# Altium PCB HOBO.PcbDoc
Units mil, origin at the board's own origin, x right, y up, seen from the top; angles counter-clockwise.
Board outline 1975 x 2065 mil, 2 copper layers (Top Layer, Bottom Layer); 17 components, 37 nets, 134 pads, 43 vias.
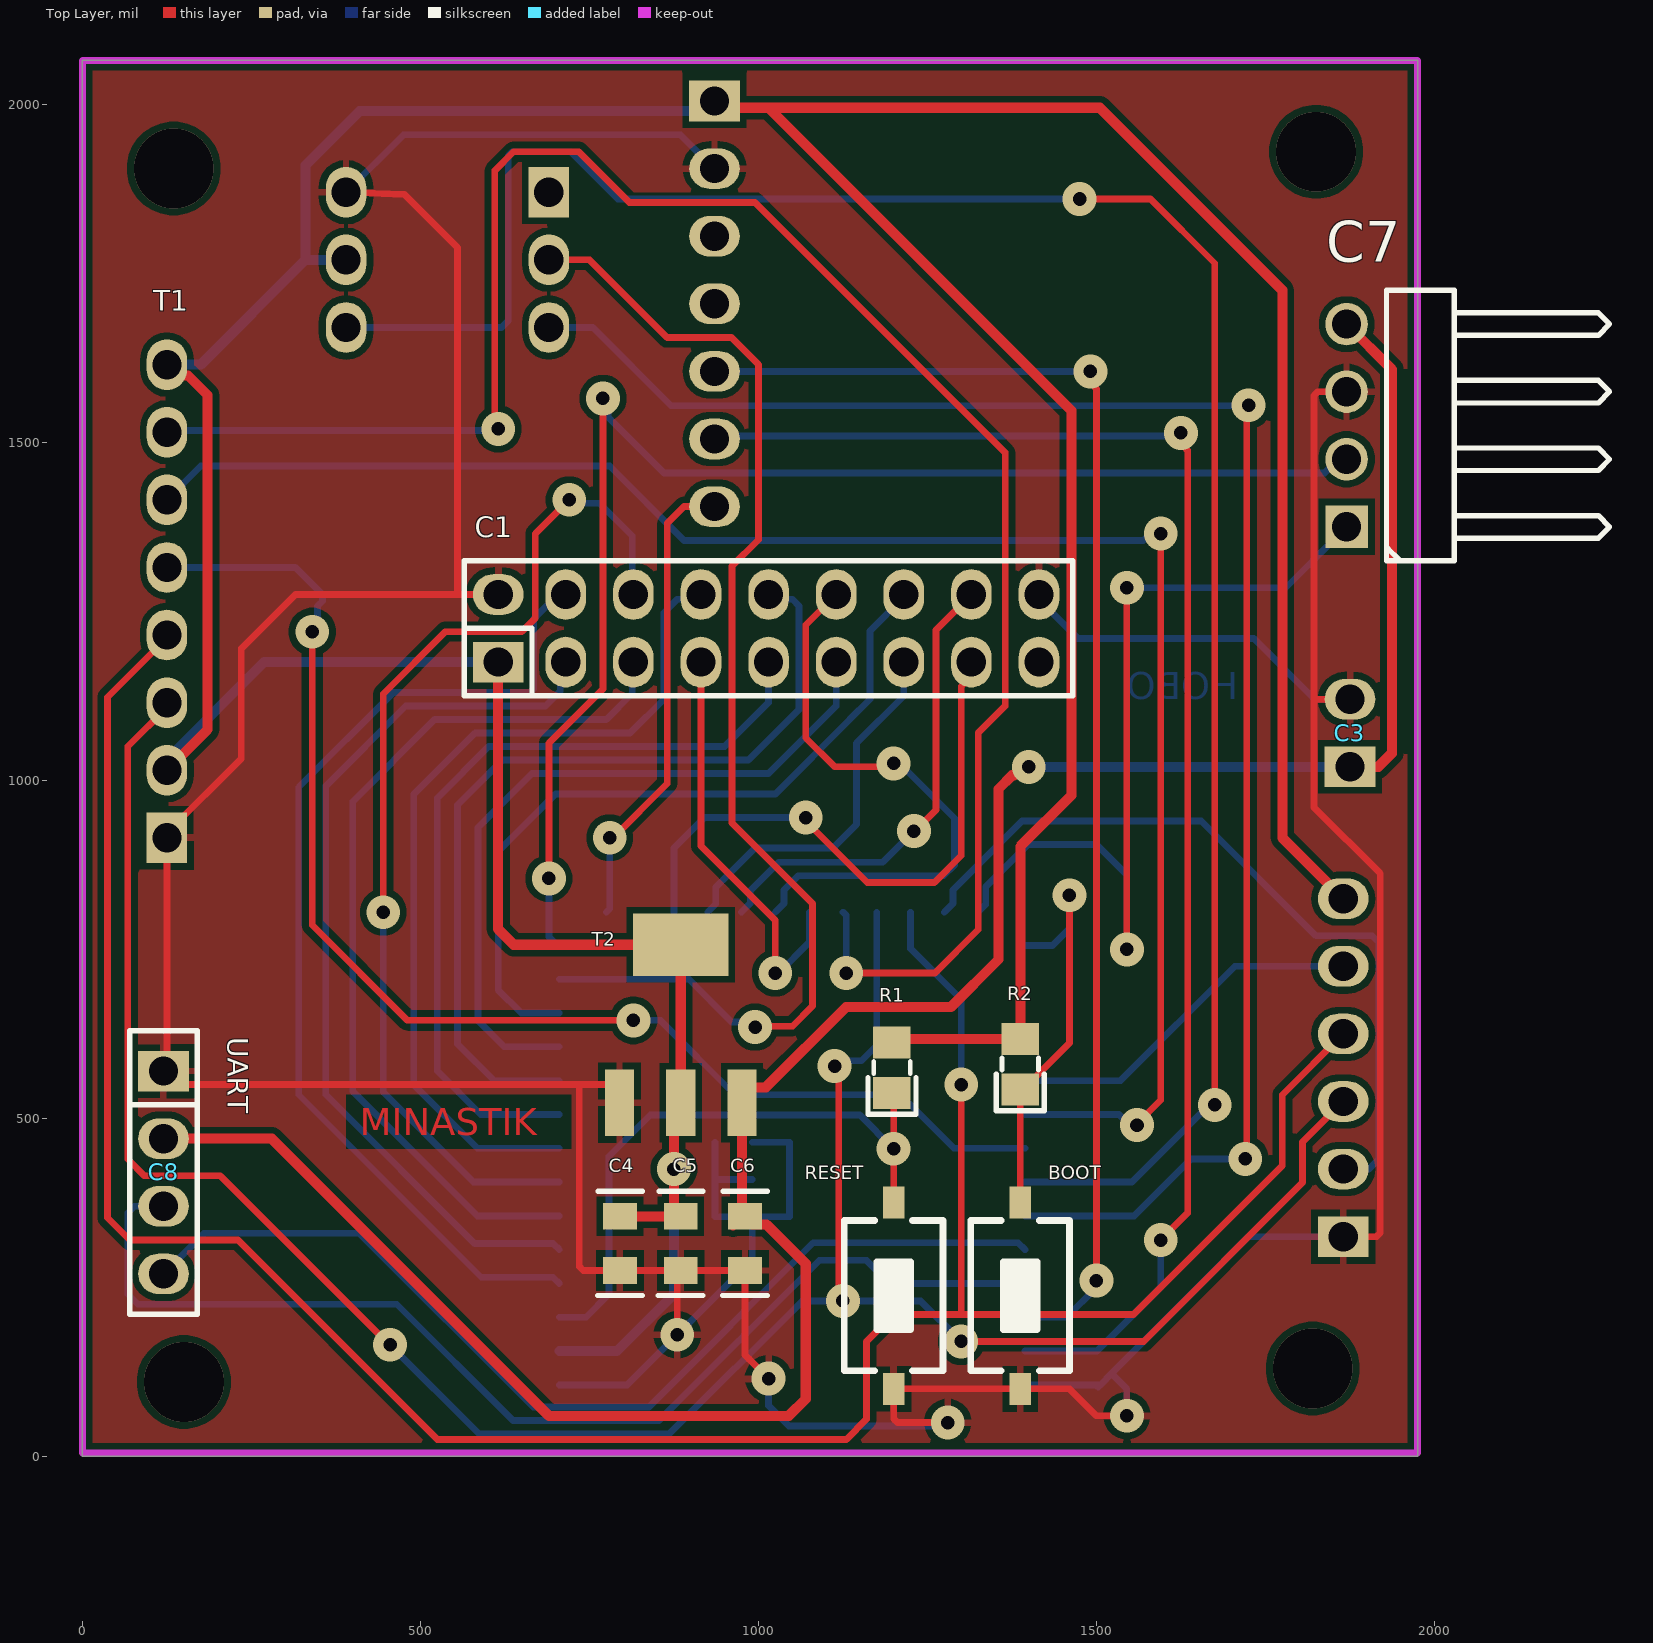
[diagram p0: Top Layer view]
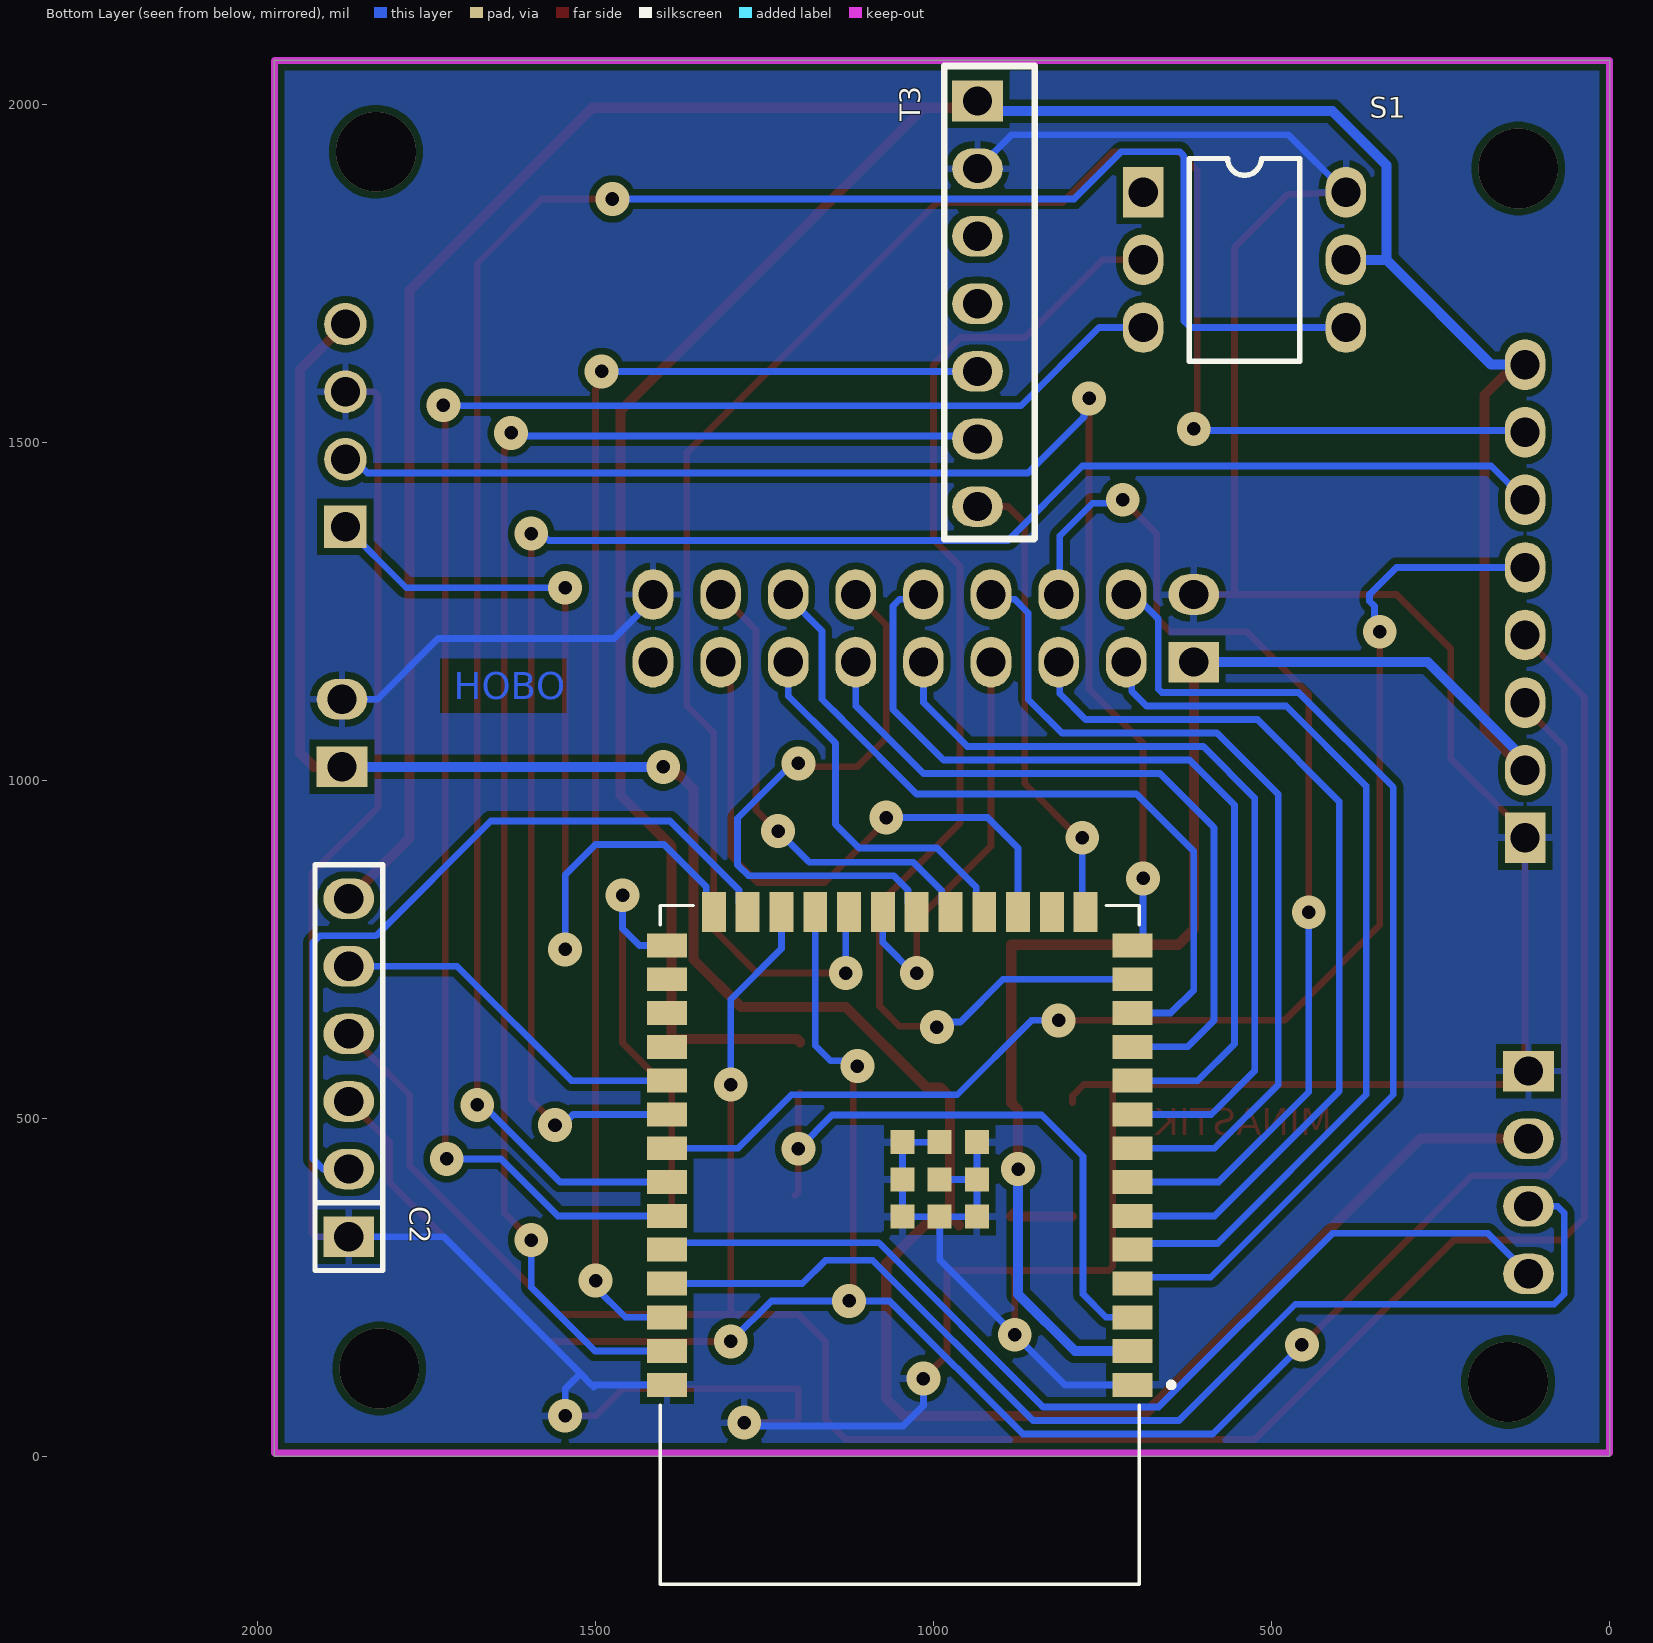
[diagram p1: Bottom Layer view, seen from below]
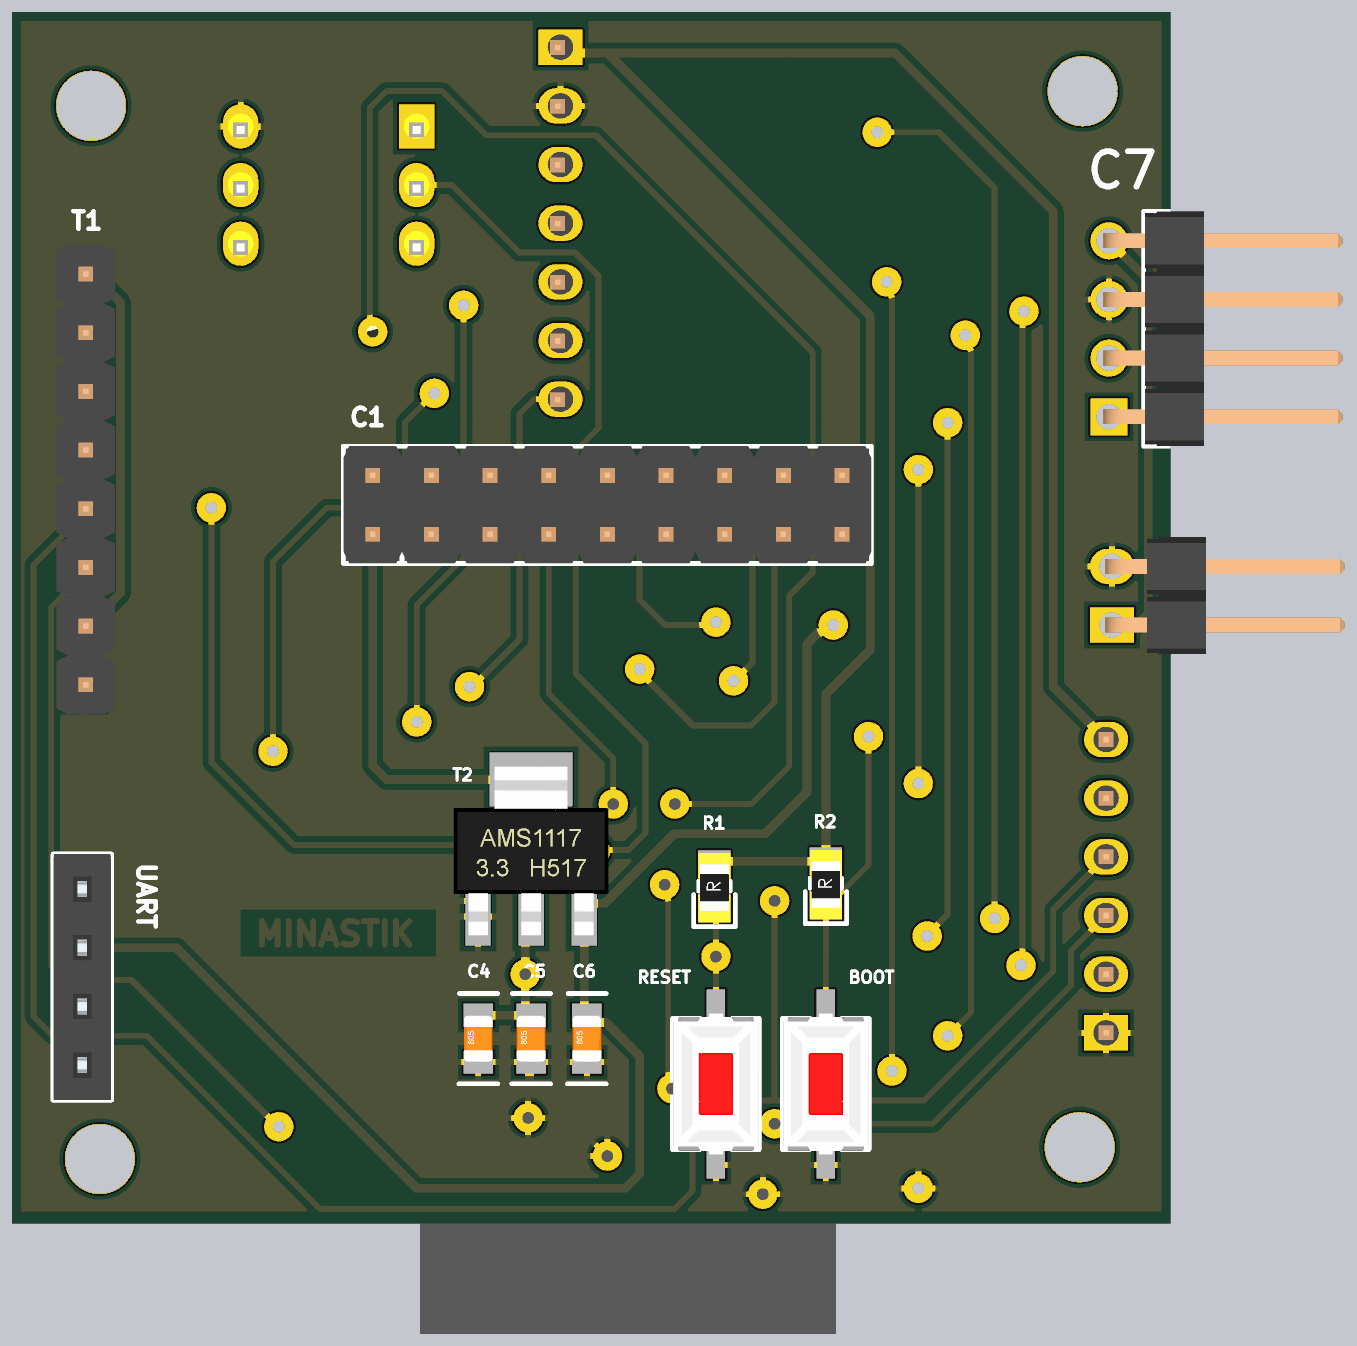
[diagram p2: 3D render of the assembled board from above, using the file's embedded part models]
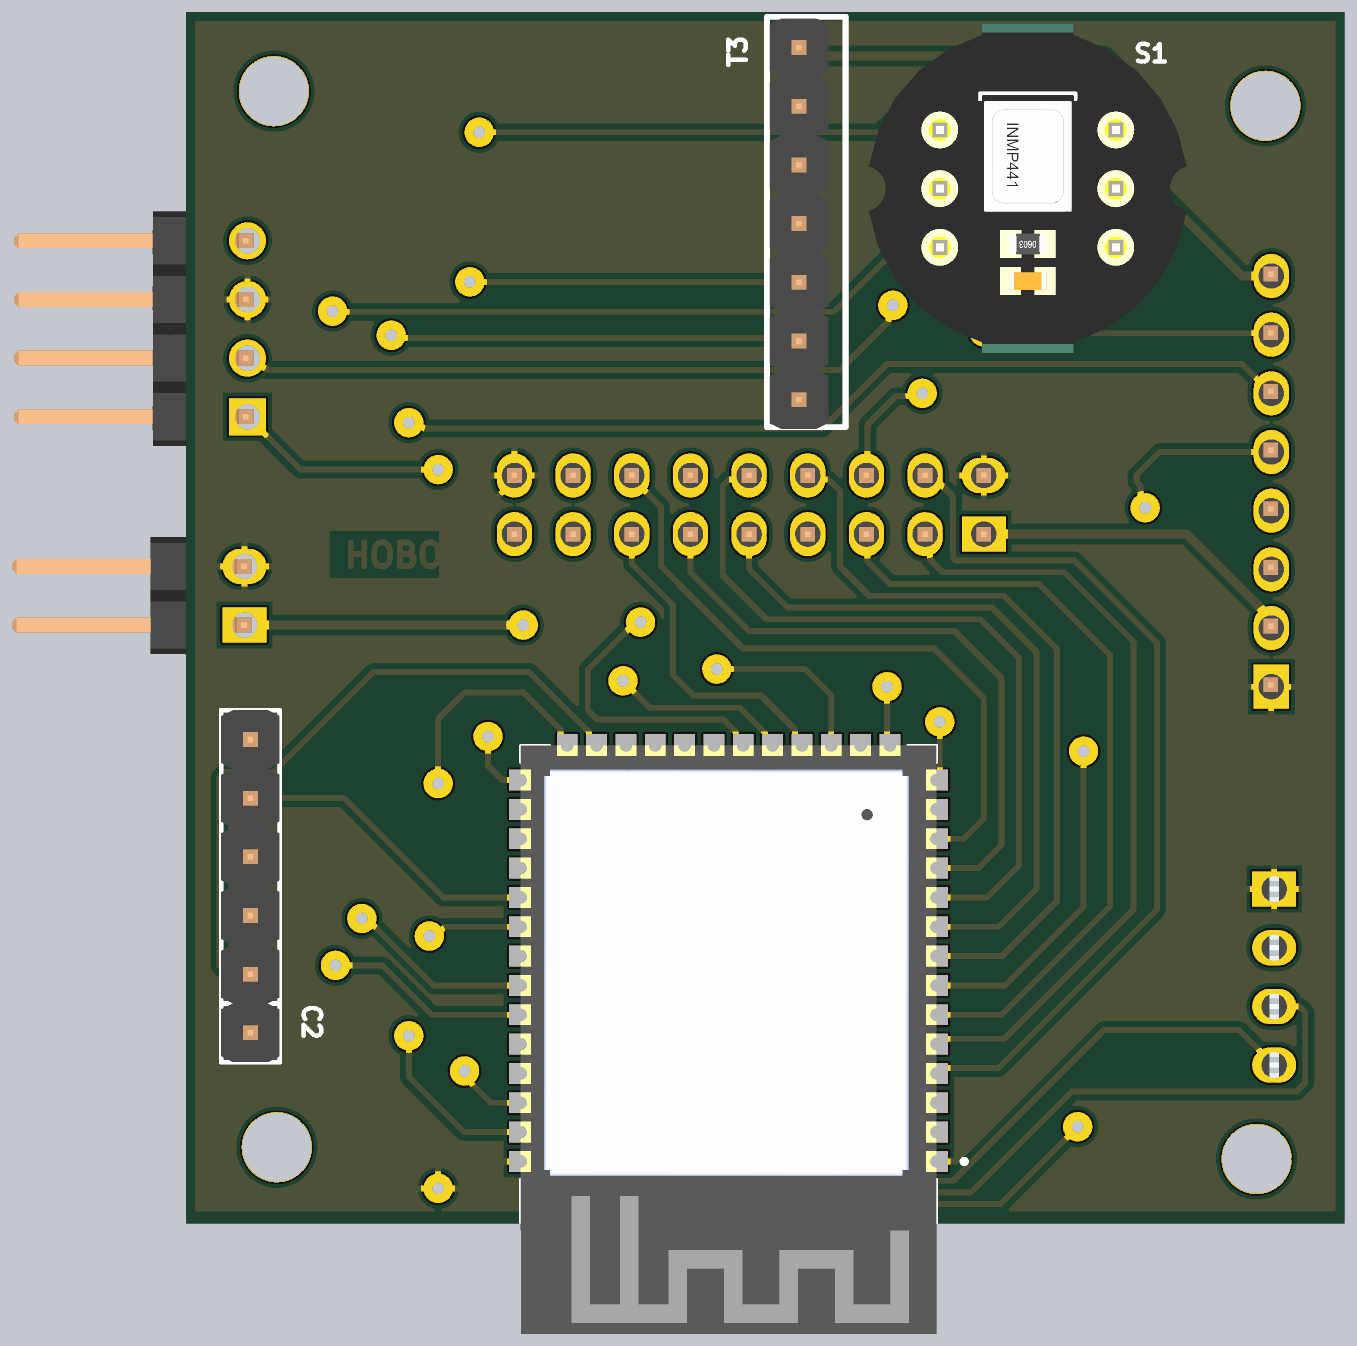
[diagram p3: 3D render of the assembled board from below, using the file's embedded part models]

## Layer stack, top to bottom
Top Solder: solder mask 0.4, Solder Resist, Dk 3.5
Top Layer: signal copper 1.4
Dielectric 1: dielectric 12.6, FR-4, Dk 4.8
Bottom Layer: signal copper 1.4
Bottom Solder: solder mask 0.4, Solder Resist, Dk 3.5

## Board outline
0,0 1975,0 1975,2065 0,2065

## Design rules (kind name [scope] priority, off if disabled: settings)
Clearance [All] p1: gap=10 ignorepadtopadclearanceinfootprint=FALSE except(0: Arc-Hole Track-Hole SMDPad-Hole THPad-Hole Via-Hole Fill-Hole Poly-Hole Region-Hole Text-Hole)
PolygonConnect [All] p1: connectstyle=Relief reliefconductorwidth=10 reliefentries=4 polygonreliefangle="90 Angle" airgapwidth=10
RoutingVias Total_Via [All] p1: holewidth=20 width=50 viastyle="Through Hole" minholewidth=20 minwidth=50 maxholewidth=20 maxwidth=50
SolderMaskExpansion [All] p1: expansion=4 istentingtop=FALSE
Width POWER_Width [InNetClass('Power')] p1: maxlimit=15 minlimit=15 preferedwidth=15
30 further rules are at their usual default settings.

## Classes and differential pairs
net class Signal: BOOT D2 D3 D4 D5 D6 D7 D8 D9 EN GND HREF LCD_CS LCD_DC LCD_RES LCD_SCL LCD_SDA M_SCK M_SD M_WS MIC_SCK MIC_SD MIC_WS PCLK PWM1 PWM2 RET RXD SD_CS SD_MI SIOC SIOD SYNC TXD XCLK
net class Power: +3.3V +5V
component class HOBO: BOOT C1 C2 C3 C4 C5 C6 C7 C8 R1 R2 RESET S1 T1 T2 T3

## Components (designator, comment, footprint, x,y, rotation, side; value= is the part's Value field where it differs from the comment)
BOOT "SW" SW1-SMD 1387.22,237.78 r270 top value="SW chip 2 pin" (schematic designator SW2)
C1 "CAM" JP9-D2T 1015,1225 r0 top
C2 "SD Card" JP6-D1T 1865,325 r90 bottom
C3 "JP2" JP2-D1C 1875,1020 r90 top
C4 "10uF" C0805 795,315 r90 top
C5 "100pF" C0805 885,315 r90 top
C6 "10uF" C0805 980,315 r90 top
C7 "JP4" JP4-D1C 1970,1725 r90 top
C8 "USB" JP4-C1T 120,570 r270 top
pw1 "ESP32-S3-WROOM-1-N8R2" XCVR_ESP32-S3-WROOM-1-N8R2 1050,312.87 r0 bottom
R1 "10k" "tro smd 0805" 1195,575 r90 top
R2 "10k" "tro smd 0805" 1385,580 r90 top
RESET "SW" SW1-SMD 1200,237.78 r90 top value="SW chip 2 pin" (schematic designator SW1)
S1 "INMP441" INMP441 540,1770 r180 bottom
T1 "LCD" "LCD jack" 125,1265 r0 top
T2 "AMS1117" AMS1117 885,640 r270 top
T3 "Max98357A" JackMax 935,1705 r0 bottom

## Footprints (in the part's own frame and the unit in brackets; to place one, negate y for a bottom-side part, rotate by r counter-clockwise, add the part's x,y. Pads: shape width x height; smd on the part's side, far side on the other; paste and mask are expansions set on the pad)
AMS1117 [mm]
  rect 2.5x1.1 smd paste+0 mask+0.051: 1(2.97,-2.3) 2(2.97,0) 3(2.97,2.3)
  rect 2.34x3.6 smd paste+0 mask+0.051: 4(-2.97,0)
  body extent -3.52,-3.35 3.78,3.35, height 1.86
C0805 [mil] "Chip Resistor; Body 2.0 x 1.3 mm (LxW typ)"
  rect 39.37x50 smd: 1(-40,0) 2(40,0)
  silkscreen extent -77,-33 77,33, body extent -39,-25 39,25, height 31
INMP441 [mil]
  rect 60x75 hole 43.31: 1(-150,100)
  oval 60x75 hole 43.31: 2(-150,0) 3(-150,-100) 4(150,-100) 5(150,0) 6(150,100)
  silkscreen extent -82,-150 82,150, body extent -271,-286 271,274, height 259
JackMax [mil]
  rect 75x60 hole 43.31: 1(0,-300)
  oval 75x60 hole 43.31: 2(0,-200) 3(0,-100) 4(0,0) 5(0,100) 6(0,200) 7(0,300)
  silkscreen extent -85,-352 49,348, body extent -55,-349 45,351, height 329
JP2-D1C [mil] "2 pins, 1 row, right angled, gold plating"
  rect 60x75 hole 43.31: 1(0,0)
  oval 60x75 hole 43.31: 2(100,0)
  body extent -50,-396 150,12, height 100
JP4-C1T [mil] "4 row, straight, gold plating"
  rect 60x75 hole 43.31: 1(0,0)
  oval 60x75 hole 43.31: 2(100,0) 3(200,0) 4(300,0)
  silkscreen extent -60,-50 360,50, body extent -60,-49 360,49, height 335
JP4-D1C [mm] "4 pins, 1 row, right angled, gold plating"
  rect 1.6x1.6 hole 1.1: 1(-8.89,2.54)
  round 1.6 hole 1.1: 2(-6.35,2.54) 3(-3.81,2.54) 4(-1.27,2.54)
  silkscreen extent -10.16,-7.34 0,1.04, body extent -10.16,-7.57 0,2.79, height 2.54
JP6-D1T [mil] "6 pins, 1 row, straight, gold plating"
  rect 60x75 hole 43.31: 1(0,0)
  oval 60x75 hole 43.31: 2(100,0) 3(200,0) 4(300,0) 5(400,0) 6(500,0)
  silkscreen extent -50,-50 550,50, body extent -50,-50 550,50, height 336
JP9-D2T [mil] "18 pins, dual pin, straight, gold plating"
  rect 75x60 hole 43.31: 1(-400,-50)
  oval 60x75 hole 43.31: 2(-300,-50) 3(-200,-50) 4(-100,-50) 5(0,-50) 6(100,-50) 7(200,-50) 8(300,-50) 9(400,-50) 10(400,50) 11(300,50) 12(200,50) 13(100,50) 14(0,50) 15(-100,50) 16(-200,50) 17(-300,50)
  oval 75x60 hole 43.31: 18(-400,50)
  silkscreen extent -450,-100 450,100, body extent -450,-100 450,100, height 337
"LCD jack" [mil]
  rect 60x75 hole 43.31: 1(0,-350)
  oval 60x75 hole 43.31: 2(0,-250) 3(0,-150) 4(0,-50) 5(0,50) 6(0,150) 7(0,250) 8(0,350)
  body extent -49,-397 51,403, height 329
SW1-SMD [mm]
  rect 1.2x0.8 smd: 1(-3.5,0) 2(3.5,0)
  silkscreen extent -2.82,-1.85 2.82,1.85, body extent -3.05,-1.85 3.05,1.85, height 2.5
"tro smd 0805" [mm]
  rect 1.2x1.4 smd: 1(-0.946,-0.061) 2(0.954,-0.061)
  silkscreen extent -1.75,-0.97 0.23,0.84, body extent -1.56,-0.76 1.44,0.64, height 0.53
XCVR_ESP32-S3-WROOM-1-N8R2 [mm]
  rect 1.5x0.9 smd: 1(-8.75,5.26) 2(-8.75,3.99) 3(-8.75,2.72) 4(-8.75,1.45) 5(-8.75,0.18) 6(-8.75,-1.09) 7(-8.75,-2.36) 8(-8.75,-3.63) 9(-8.75,-4.9) 10(-8.75,-6.17) 11(-8.75,-7.44) 12(-8.75,-8.71) 13(-8.75,-9.98) 14(-8.75,-11.25) 27(8.75,-11.25) 28(8.75,-9.98) 29(8.75,-8.71) 30(8.75,-7.44) 31(8.75,-6.17) 32(8.75,-4.9) 33(8.75,-3.63) 34(8.75,-2.36) 35(8.75,-1.09) 36(8.75,0.18) 37(8.75,1.45) 38(8.75,2.72) 39(8.75,3.99) 40(8.75,5.26)
  rect 0.9x1.5 smd: 15(-6.985,-12.5) 16(-5.715,-12.5) 17(-4.445,-12.5) 18(-3.175,-12.5) 19(-1.905,-12.5) 20(-0.635,-12.5) 21(0.635,-12.5) 22(1.905,-12.5) 23(3.175,-12.5) 24(4.445,-12.5) 25(5.715,-12.5) 26(6.985,-12.5)
  rect 0.9x0.9 smd: 41_1(-1.5,-2.46) 41_2(-2.9,-2.46) 41_3(-0.1,-2.46) 41_4(-2.9,-3.86) 41_5(-1.5,-3.86) 41_6(-0.1,-3.86) 41_7(-2.9,-1.06) 41_8(-1.5,-1.06) 41_9(-0.1,-1.06)
  round 0.4 on Mech15 mask+0: 41_10(-1.5,-1.76) 41_11(-2.9,-1.76) 41_12(-0.1,-1.76) 41_13(-2.9,-3.16) 41_14(-1.5,-3.16) 41_15(-0.1,-3.16) 41_16(-2.2,-1.06) 41_17(-0.8,-1.06) 41_18(-2.2,-2.46) 41_19(-0.8,-2.46) 41_20(-2.2,-3.86) 41_21(-0.8,-3.86)
  silkscreen extent -10.3,-12.75 9,12.75, body extent -9,-12.75 9,12.75, height 3.25

## Part data
BOOT RESET: library part SW2, "Switch button 2 pin"
C1: library part JP9x2, "WR-PHD 2.54 mm Dual Socket Header", Manufacturer="W¨¹rth Elektronik eiSos GmbH", partNo=61301821821, ComponentLink1 Description=Manufacturer, ComponentLink1URL=http://www.we-online.com, ComponentLink2 Description=Datasheet, ComponentLink2URL=http://katalog.we-online.de/em/datasheet/6130xx21821.pdf, Created by="Karrer Zheng", Created Date="29 March 2013", NoPins=18
C2: library part JP6, "WR-PHD 2.54 mm Angled Socket Header", Manufacturer="W¨¹rth Elektronik eiSos GmbH", partNo=613006143121, ComponentLink1 Description=Manufacturer, ComponentLink1URL=http://www.we-online.com, ComponentLink2 Description=Datasheet, ComponentLink2URL=http://katalog.we-online.de/em/datasheet/6130xx143121.pdf, Created by="Karrer Zheng", Created Date="29 March 2013", NoPins=06
C3: "WR-PHD 2.54 mm Angled Socket Header", Manufacturer="W¨¹rth Elektronik eiSos GmbH", partNo=613002143121, ComponentLink1 Description=Manufacturer, ComponentLink1URL=http://www.we-online.com, ComponentLink2 Description=Datasheet, ComponentLink2URL=http://katalog.we-online.de/em/datasheet/6130xx143121.pdf, Created by="Karrer Zheng", Created Date="29 March 2013", NoPins=02
C4 C6: JLCPCB SMD=Yes, Manufacturer=FH, Manufacturer Part=0805F106M160NT, nameAlias=Capacitance, SMT Type=Extend, spicePre=C, spiceSymbolName=0805F106M160NT, Supplier=LCSC, Supplier Part=C90545
C5: library part 10uF, JLCPCB SMD=Yes, Manufacturer=FH, Manufacturer Part=0805F106M160NT, nameAlias=Capacitance, SMT Type=Extend, spicePre=C, spiceSymbolName=0805F106M160NT, Supplier=LCSC, Supplier Part=C90545
C7: "WR-PHD 2.54 mm Angled Socket Header", Manufacturer="W¨¹rth Elektronik eiSos GmbH", partNo=613004143121, ComponentLink1 Description=Manufacturer, ComponentLink1URL=http://www.we-online.com, ComponentLink2 Description=Datasheet, ComponentLink2URL=http://katalog.we-online.de/em/datasheet/6130xx143121.pdf, Created by="Karrer Zheng", Created Date="29 March 2013", NoPins=04
C8: library part JP4, "WR-PHD 2.54 mm Angled Socket Header", Manufacturer="W¨¹rth Elektronik eiSos GmbH", partNo=613004143121, ComponentLink1 Description=Manufacturer, ComponentLink1URL=http://www.we-online.com, ComponentLink2 Description=Datasheet, ComponentLink2URL=http://katalog.we-online.de/em/datasheet/6130xx143121.pdf, Created by="Karrer Zheng", Created Date="29 March 2013", NoPins=04
pw1: Package=None, Availability=Unavailable, MF="{'manufacturer': u'Espressif Systems'}", MP=ESP32-S3-WROOM-1-N8R2, Price=None
R1 R2: library part "Tro 0805 1% 10k", "Dán", Chung_Loai=Dán, Don_Vi=Con, Ma_Hang=MH005473, So_Chan=2, Ten_Linh_Kien="Trở 0805 1% 10k"

## Via types
v1: diameter 50, hole 20, Top Layer to Bottom Layer, 39 vias
v2: diameter 118.11, hole 118.11, Top Layer to Bottom Layer, 4 vias

## Nets (pads, with @x,y where several pads share a name; then routed paths per layer and width w, separated by ;. In a path a pad name is that pad's centre, name@x,y a point inside that pad or via, vN(x,y) a via of type N, cw(c..) or ccw(c..) an arc to the next point about the centre after c; other vN are vias at no path point)
+3.3V: C1.1 C2.6 C4.2 C5.2 pw1.2 R1.2 R2.2 S1.5 T1.2 T1.8 T2.2 T2.4 T3.1 | length 7583.5
  Top Layer w15: T1.2 185,1075 185,1570 156.11,1598.89 141.11,1598.89 T1.8 ; C1.1 615,780 638.07,756.93 T2.4 T2.2 875,513.07 v1(875,425) 875,365 C5.2 C4.2 ; T3.1 945,1995 1015,1995 ; R1.2 1202.39,617.57 R2.2 1387.39,902.39 1463,978 1463,1547 1015,1995 ; C2.6 1775,915 1775,1725 1505,1995 1015,1995
  Bottom Layer w15: T1.2 125,1031 269,1175 C1.1 ; T1.8 175,1615 330,1770 335,1770 ; S1.5 335,1770 ; pw1.2 790.79,155.79 875,240 v1(875,425) ; T3.1 920,1990 410,1990 330,1910 330,1775 335,1770
+5V: C3.1 C6.2 C7.4 C8.2 T2.3 | length 3631.8
  Top Layer w15: C8.2 280,470 690,60 1045,60 1070,85 1070,285 1012.19,342.81 992.19,342.81 C6.2 C6.2@975.55,355 ; C6.2@962.5,341.95 962.5,342.81 974.69,355 C6.2@975.55,355 ; v1(1400,1020) 1390.53,1020 1378.05,1007.52 1375.3,1007.52 1355,987.22 1355,735 1284.5,664.5 1129.5,664.5 1010.92,545.92 989.71,545.92 975.55,531.77 T2.3 C6.2@975.55,355 ; C7.4 1937,1608 1937,1040 1917,1020 C3.1
  Bottom Layer w15: v1(1400,1020) C3.1
BOOT: BOOT.1 pw1.27 R2.1 | length 612
  Top Layer w10: BOOT.1 1387.22,459 1387.39,459.17 R2.1 1391.33,542.77 1460,611.44 v1(1460,830)
  Bottom Layer w10: pw1.27 1435,755.79 1460,780.79 v1(1460,830)
D2: C1.11 pw1.19 | length 701.5
  Top Layer w10: v1(1230,925) 1231.36,925 1262.5,956.14 1262.5,1222.5 C1.11
  Bottom Layer w10: pw1.19 987.72,817.72 987.72,836.17 1030.54,879 1184,879 v1(1230,925)
D3: C1.8 pw1.17 | length 890.2
  Top Layer w10: v1(1070,945) 1070,940 1161,849 1260.18,849 1300,888.82 1300,1138.97 1315,1153.97 C1.8
  Bottom Layer w10: pw1.17 875,900 920,945 v1(1070,945)
D4: C1.12 pw1.12 | length 1128.8
  Bottom Layer w10: pw1.12 649.21,655.79 615,690 615,895 700,980 1025.28,980 1135,1089.72 1135,1090 1165,1120 1165,1221 1215,1271 C1.12
D5: C1.7 pw1.18 | length 557.5
  Bottom Layer w10: pw1.18 936.73,816.73 936.73,841.73 995,900 1110,900 1145,935 1145,1055 1215,1125 C1.7
D6: C1.13 pw1.20 | length 878.8
  Top Layer w10: C1.13 1070,1230 1070,1063 1113,1020 1195,1020 v1(1200,1025)
  Bottom Layer w10: pw1.20 1037.72,817.72 1037.72,837.72 1059,859 1274,859 1290,875 1290,944 1209,1025 v1(1200,1025)
D7: C1.6 pw1.11 | length 1091.3
  Bottom Layer w10: pw1.11 624.21,605.79 585,645 585,930 665,1010 1015,1010 1115,1110 C1.6
D8: C1.14 pw1.10 | length 1299.3
  Bottom Layer w10: pw1.10 609.21,555.79 555,610 555,963.65 621.35,1030 985,1030 1060,1105 1060,1258 1050,1268 1015,1268 C1.14
D9: C1.5 pw1.9 | length 1219.5
  Bottom Layer w10: pw1.9 589.21,505.79 525,570 525,974 601,1050 950,1050 1015,1115 C1.5
EN: pw1.3 R1.1 RESET.2 | length 913.9
  Top Layer w10: R1.1 1200,535.17 1200,390.67 RESET.2@1205,385.67
  Bottom Layer w10: pw1.3 744.79,205.79 779,240 779,444 840,505 1150,505 v1(1200,455)
GND: BOOT.2 C1.10 C1.18 C2.1 C3.2 C4.1 C5.1 C6.1 C7.3 C8.1 pw1.1 pw1.40 pw1.41_1 pw1.41_2 pw1.41_3 pw1.41_4 pw1.41_5 pw1.41_6 pw1.41_7 pw1.41_8 pw1.41_9 RESET.1 S1.6 T1.1 T2.1 T3.2 | length 8169.2
  Top Layer w10: S1.6 390.31,1869.99 476.32,1866.68 552.07,1790.93 555,1788 555,1275 ; C1.18 555,1275 ; T2.1 794.45,533.35 777.8,550 735,550 ; v1(880,180) 880,270 C5.1 ; v1(1015,115) 980,150 C6.1 C5.1 ; v1(1280,50) 1205.86,50 1200,55.86 RESET.1 1205.02,99.98 BOOT.2 1460.02,99.98 1500,60 v1(1545,60) ; C2.1 1914.14,325 1920,330.86 1920,862 1822,960 1822,1119 ; C7.3 1827.86,1575 1822,1569.14 1822,1119 ; C3.2 1823,1120 1822,1119 ; 555,1275 315,1275 235,1195 235,1032.5 125,922.5 125,570 C8.1 140,550 735,550 ; 735,550 735,280.86 740.86,275 C4.1 880,275 C5.1
  Bottom Layer w10: S1.6 475,1955 885,1955 T3.2 ; pw1.1 805.79,105.79 v1(880,180) 990.94,290.94 pw1.41_8 ; pw1.41_4 pw1.41_2 ; pw1.41_1 pw1.41_2 ; pw1.41_5 pw1.41_6 pw1.41_3 pw1.41_9 pw1.41_8 ; v1(1015,115) 1015,75 1045,45 1275,45 v1(1280,50) ; pw1.40 1499.21,105.79 ; C1.10 1415,1267.5 1472.5,1210 1732.81,1210 1822.81,1120 C3.2 ; 1502.5,102.5 1499.21,105.79 ; v1(1545,60) 1545,99.89 1522.45,122.45 ; C2.1 1725,325 1522.45,122.45 ; pw1.41_2 pw1.41_7 pw1.41_8 ; 1499.21,105.79 1505.79,105.79 1522.45,122.45
HREF: C1.16 pw1.7 | length 1574.6
  Top Layer w10: v1(445,805) 445,1128 537,1220 650,1220 670,1240 670,1365 v1(720,1415)
  Bottom Layer w10: v1(445,805) 445,539 578.21,405.79 pw1.7 ; v1(720,1415) 725,1410 765,1410 813.36,1361.64 813.36,1276.64 C1.16
LCD_CS: pw1.22 T1.7 | length 2863.2
  Top Layer w10: v1(615,1520) 610,1525 610,1902 638,1930 734,1930 809,1855 995,1855 1365,1485 1365,1110 1325,1070 1325,779 1261,715 v1(1130,715)
  Bottom Layer w10: T1.7 127.5,1517.5 612.5,1517.5 v1(615,1520) ; pw1.22 1130,800 v1(1130,715)
LCD_DC: pw1.32 T1.6 | length 2602
  Top Layer w10: v1(1560,490) 1560,491.88 1595,526.88 v1(1595,1365)
  Bottom Layer w10: T1.6 175,1465 780,1465 890,1355 1569.14,1355 1571.49,1357.35 1587.35,1357.35 v1(1595,1365) ; pw1.32 1533.39,505.79 1549.18,490 v1(1560,490)
LCD_RES: pw1.33 T1.5 | length 1933
  Top Layer w10: v1(340,1220) 340,786 481,645 v1(815,645)
  Bottom Layer w10: T1.5 315,1315 355,1275 355,1265 347.65,1257.65 347.65,1227.65 v1(340,1220) ; v1(815,645) 855,645 965,535 1210,535 1289.21,455.79 pw1.33
LCD_SCL: C2.3 pw1.23 T1.3 | length 3578.4
  Top Layer w10: T1.3 125,1108 67,1050 67,440 92,415 204,415 454,165 v1(455,165) ; v1(1112.55,577.45) 1118.78,571.22 1118.78,236.22 v1(1125,230) ; v1(1300,170) 1570,170 1805,405 1805,465 C2.3
  Bottom Layer w10: v1(455,165) 587,33 868,33 1065,230 1240,230 v1@1299.62,170.38 ; v1(1112.55,577.45) 1120.21,585.1 1152.1,585.1 1175,608 pw1.23
LCD_SDA: C2.4 pw1.24 T1.4 | length 3865.8
  Top Layer w10: T1.4 125,1211 37,1123 37,353 70,320 230,320 525,25 1130,25 1160,55 1160,170 1200,210 1300,210 ; v1(1300,550) 1300,210 ; C2.4 1775,535 1775,430 1555,210 1300,210
  Bottom Layer w10: pw1.24 1225,751 1300,676 v1(1300,550)
M_SCK: pw1.39 T3.6 | length 2218
  Top Layer w10: v1(1595,320) 1635,360 1635,1488.14 1632.65,1490.49 1632.65,1506.35 v1(1625,1514)
  Bottom Layer w10: T3.6 939.5,1509.5 1620.5,1509.5 v1(1625,1514) ; pw1.39 1500.79,155.79 1595,250 v1(1595,320)
M_SD: pw1.38 T3.5 | length 2038.6
  Top Layer w10: v1(1491,1605) 1498.65,1597.35 1498.65,1580.49 1500,1579.14 v1(1500,260)
  Bottom Layer w10: T3.5 v1(1491,1605) ; pw1.38 1455.79,205.79 1500,250 v1(1500,260)
M_WS: pw1.15 T3.7 | length 695.6
  Top Layer w10: v1(780,915) 785,915 865,995 865,1380 890,1405 T3.7
  Bottom Layer w10: pw1.15 780,810 v1(780,915)
MIC_SCK: pw1.35 S1.3 | length 2560.9
  Top Layer w10: v1(1720,440) 1722.5,442.5 1722.5,1552.5 v1(1725,1555)
  Bottom Layer w10: S1.3 755,1670 871,1554 1724,1554 v1(1725,1555) ; pw1.35 1555.79,355.79 1640,440 v1(1720,440)
MIC_SD: pw1.34 S1.4 | length 3176.9
  Top Layer w10: v1(1475,1860) 1580,1860 1675,1765 v1(1675,520)
  Bottom Layer w10: S1.4 620,1670 630,1680 630,1924.14 635.86,1930 722,1930 792,1860 v1(1475,1860) ; pw1.34 1552.5,405.79 1666.72,520 v1(1675,520)
MIC_WS: pw1.13 S1.2 | length 1805.2
  Top Layer w10: S1.2 750,1770 865,1655 960,1655 1000,1615 1000,1356 961,1317 961,937 1080,818 1080,666.11 1050.23,636.34 996.34,636.34 v1(995,635)
  Bottom Layer w10: pw1.13 897.21,705.79 960.35,642.65 987.35,642.65 v1(995,635)
PCLK: C1.4 pw1.21 | length 619.2
  Top Layer w10: C1.4 915,903 1025,793 v1(1025,715)
  Bottom Layer w10: v1(1025,715) 1030,715 1075,760 pw1.21
PWM1: C7.2 pw1.14 | length 2016.2
  Top Layer w10: v1(690,855) 690,1055 770,1135 v1(770,1565)
  Bottom Layer w10: v1(690,855) 690,768.5 702.72,755.79 pw1.14 ; v1(770,1565) 777.65,1557.35 777.65,1537.35 860.27,1454.73 1837.65,1454.73 1857.92,1475 C7.2
PWM2: C7.1 pw1.26 | length 1302.6
  Top Layer w10: v1(1545,750) v1(1545,1285)
  Bottom Layer w10: pw1.26 1336.17,816.17 1336.17,842.28 1398.89,905 1500,905 1545,860 v1(1545,750) ; v1(1545,1285) 1780,1285 C7.1
RET: C1.9
RXD: C8.4 pw1.36 | length 1510.7
  Bottom Layer w10: C8.4 180,330 410,330 667,73 838,73 1081,316 1384.28,316 pw1.36
SD_CS: C2.5 pw1.31 | length 540.6
  Bottom Layer w10: pw1.31 1535.79,555.79 1705,725 C2.5
SD_MI: C2.2 pw1.25 | length 1164.4
  Bottom Layer w10: pw1.25 1287.72,817.72 1287.72,837.72 1390,940 1655,940 1825,770 1908,770 1918,760 1918,440 1903,425 C2.2
SIOC: C1.2 pw1.5 | length 1348.6
  Bottom Layer w10: pw1.5 696.3,315 580,315 360,535 360,991.73 478.27,1110 685,1110 706.93,1131.93 706.93,1166.93 C1.2
SIOD: C1.17 pw1.4 | length 1539.2
  Bottom Layer w10: pw1.4 696.3,265 590,265 320,535 320,990 460,1130 662.5,1130 667.5,1135 667.5,1239 688,1259.5 715,1259.5 C1.17
SYNC: C1.3 pw1.6 | length 1337.5
  Bottom Layer w10: pw1.6 584.21,355.79 400,540 400,969.04 520.96,1090 775,1090 813.36,1128.36 813.36,1173.36 C1.3
TXD: C8.3 pw1.37 | length 1694.4
  Bottom Layer w10: C8.3 77,370 67,360 67,240 82,225 465,225 637,53 853,53 1090,290 1160,290 1194.21,255.79 pw1.37
XCLK: C1.15 pw1.8 | length 1310.2
  Bottom Layer w10: pw1.8 584.21,455.79 490,550 490,979 581,1070 810,1070 860,1120 860,1248 880,1268 915,1268 C1.15
pads on no net: pw1.16 pw1.28 pw1.29 pw1.30 pw1.41_10 pw1.41_11 pw1.41_12 pw1.41_13 pw1.41_14 pw1.41_15 pw1.41_16 pw1.41_17 pw1.41_18 pw1.41_19 pw1.41_20 pw1.41_21 S1.1 T3.3 T3.4
copper on no net:
  other v2: 150,110 1820,130 135,1905 1825,1930

## Polygon pours and split planes (outlines as drawn)
GND on Top Layer "Top GND" (solid, remove dead copper, pour order 0): 5,2065 1975,2065 1975,-5 5,-5 0,0
GND on Bottom Layer "Bottom GND" (solid, remove dead copper, pour order 1): 5,2065 15,2055 1960,2055 1960,15 10,15

## Keep-outs
Keep-Out Layer:
  lines w10: 0,5 0,2065 1975,2065 1975,5 0,5

## Other copper
Top Layer:
  text "MINASTIK" at 410,475 h40
Bottom Layer:
  text "HOBO" at 1710,1120 h40

## Silkscreen, mask and mechanical layers (free items; w line width, h text height)
Top Overlay:
  text "UART" at 215,620 h30 r270
Mechanical 15:
  lines w10: 850,1360 850,2055 1645,2055 1645,1360 ; 65,640 1870,640 1870,1915 65,1915 65,640

## Text inside footprints (layer, text, board x,y; h text height)
pw1: Mechanical 13 "ANTENNA" at 872.83,-61.14 h50 r180